# EAGLE board tx-slim-2.4g (EAGLE 9.6.2)
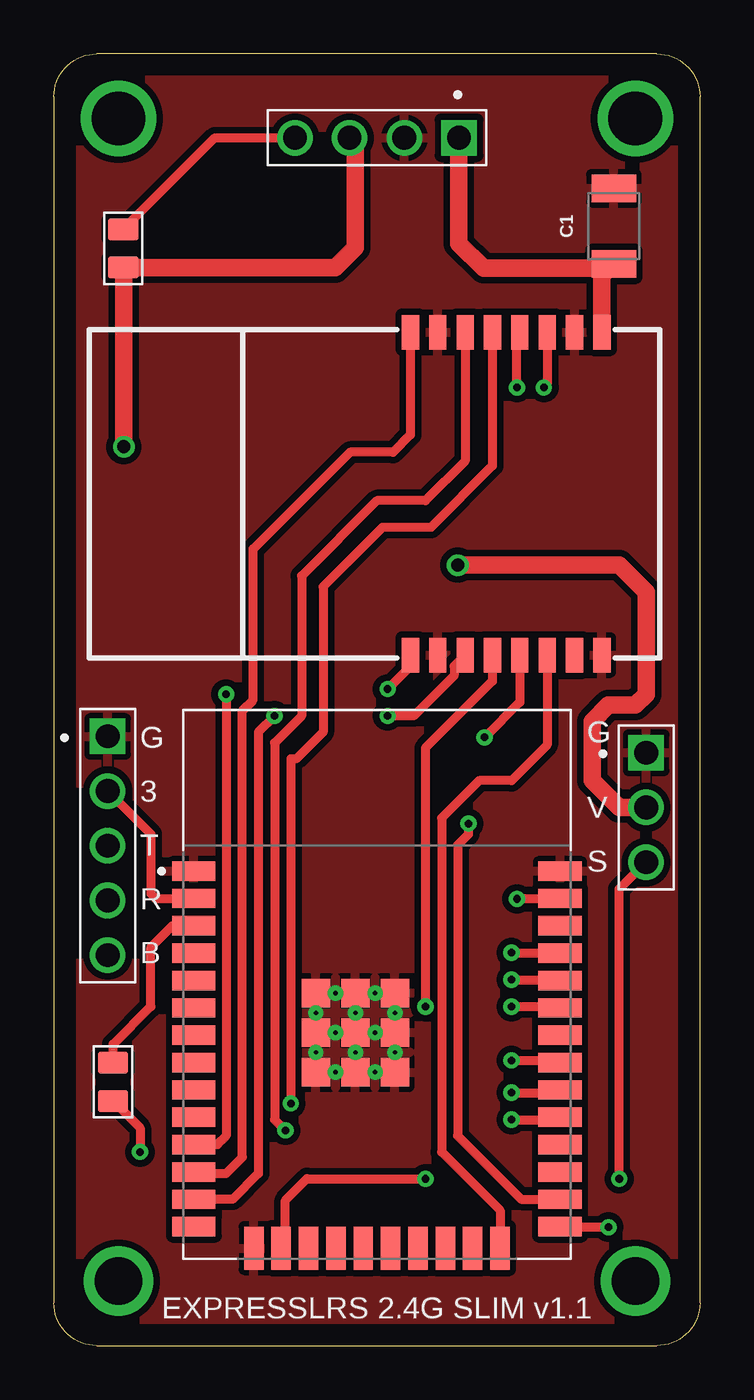
[diagram p0: board, top side]
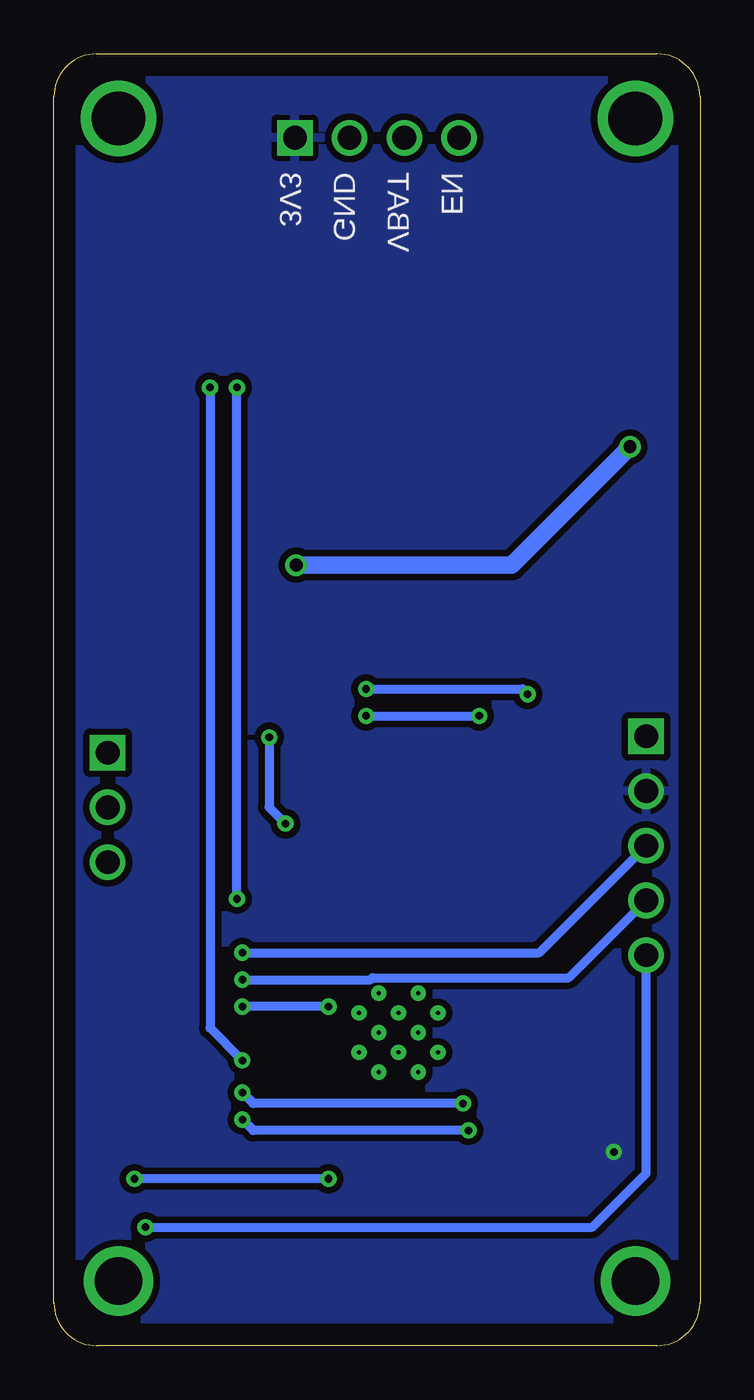
[diagram p1: board, bottom side, seen from below]

Size 30 x 60 mm. Coordinates in mm from the lower left corner, seen from the top.
Outline: 2,0 28,0 arc90 30,2 30,58 arc90 28,60 2,60 arc90 0,58 0,2 arc90 2,0
Copper layers (1*16): Top 0.035mm / dielectric 1.5mm / Bottom 0.035mm
Design rules "default": minimum track width 6mil, minimum drill 0.35mm, track to track 6mil, track to pad 6mil, pad to pad 6mil, via to via 6mil, smd to smd 6mil, copper to edge 40mil, drill to drill 6mil, minimum pad ring 10mil, minimum via ring 8mil, stop-mask expansion 4mil, vias tented up to drill 0mil, thermal gap 10mil

## Footprints (pad centres in the part's own frame; a part is rotated, then mirrored left to right if it is on the bottom)
1210 = smd 1.27 x 2.06: 1 -1.755,0; 2 1.755,0
61300411121 = drill 1.1 square: 1 -3.81,0 | drill 1.1: 2 -1.27,0; 3 1.27,0; 4 3.81,0
61300311121 = drill 1.1 square: 1 -2.54,0 | drill 1.1: 2 0,0; 3 2.54,0
61300511121 = drill 1.1 square: 1 -5.08,0 | drill 1.1: 2 -2.54,0; 3 0,0; 4 2.54,0; 5 5.08,0
MODULE_ESP32-WROOM-32 = smd 2 x 0.9: 1 -8.5,5.26; 2 -8.5,3.99; 3 -8.5,2.72; 4 -8.5,1.45; 5 -8.5,0.18; 6 -8.5,-1.09; 7 -8.5,-2.36; 8 -8.5,-3.63; 9 -8.5,-4.9; 10 -8.5,-6.17; 11 -8.5,-7.44; 12 -8.5,-8.71; 13 -8.5,-9.98; 14 -8.5,-11.25; 25 8.5,-11.25; 26 8.5,-9.98; 27 8.5,-8.71; 28 8.5,-7.44; 29 8.5,-6.17; 30 8.5,-4.9; 31 8.5,-3.63; 32 8.5,-2.36; 33 8.5,-1.09; 34 8.5,0.18; 35 8.5,1.45; 36 8.5,2.72; 37 8.5,3.99; 38 8.5,5.26 | smd 0.9 x 2: 15 -5.715,-12.25; 16 -4.445,-12.25; 17 -3.175,-12.25; 18 -1.905,-12.25; 19 -0.635,-12.25; 20 0.635,-12.25; 21 1.905,-12.25; 22 3.175,-12.25; 23 4.445,-12.25; 24 5.715,-12.25 | smd 1.33 x 1.33: 39_1 -2.835,-0.405; 39_2 -1,-0.405; 39_3 0.835,-0.405; 39_4 -2.835,-2.24; 39_5 -1,-2.24; 39_6 0.835,-2.24; 39_7 -2.835,-4.075; 39_8 -1,-4.075; 39_9 0.835,-4.075 | drill 0.2 pad 0.3: 39_10 -1.917,-0.405; 39_11 -0.083,-0.405; 39_12 -2.835,-1.323; 39_13 -1,-1.323; 39_14 0.835,-1.323; 39_15 -1.917,-2.24; 39_16 -0.083,-2.24; 39_17 -2.835,-3.158; 39_18 -1,-3.158; 39_19 0.835,-3.158; 39_20 -1.917,-4.075; 39_21 -0.083,-4.075
E28 = smd 1.6 x 0.8: P$1 -7.5,-4.445; P$2 -7.5,-3.175; P$3 -7.5,-1.905; P$4 -7.5,-0.635; P$5 -7.5,0.635; P$6 -7.5,1.905; P$7 -7.5,3.175; P$8 -7.5,4.445; P$9 7.5,-4.445; P$10 7.5,-3.175; P$11 7.5,-1.905; P$12 7.5,-0.635; P$13 7.5,0.635; P$14 7.5,1.905; P$15 7.5,3.175; P$16 7.5,4.445
R0805 = smd 1.397 x 1.016: 1 0,0.889; 2 0,-0.889

## Placement (x,y rotation side)
C1  10uF  [1210]  26,52 90 top
J1  61300411121  [61300411121]  15,56.1 180 top
J2  61300311121  [61300311121]  27.5,25 270 top
J3  61300511121  [61300511121]  2.5,23.22 270 top
U1  ESP32-WROOM-32  [MODULE_ESP32-WROOM-32]  15,16.78 0 top
U$1  E28  [E28]  21,39.57 270 top
U$2  10K  [R0805]  3.22,50.96 180 top
U$3  10K  [R0805]  2.75,12.25 0 top

## Library data of the parts
C1 = SparkFun-Capacitors; PROD_ID: CAP-09824
J1 = Headers; CREATED_BY: PCBLayout.com; DIGI_KEY_PART_NUMBER: 732-5317-ND; MANUFACTURER: Wurth Electronics Inc.; MPN: 61300411121
J2 = Headers; CREATED_BY: PCBLayout.com; DIGI_KEY_PART_NUMBER: 732-5316-ND; MANUFACTURER: Wurth Electronics Inc.; MPN: 61300311121
J3 = Headers; CREATED_BY: PCBLayout.com; DIGI_KEY_PART_NUMBER: 732-5318-ND; MANUFACTURER: Wurth Electronics Inc.; MPN: 61300511121
U1 = ESP32-WROOM-32; AVAILABILITY: Warning; DESCRIPTION: Bluetooth, WiFi Transceiver Module 2.4GHz ~ 2.5GHz Surface Mount; DIGIKEY-PURCHASE-URL: https://snapeda.com/shop?store=DigiKey&id=2753322; MF: Espressif Systems; MP: ESP32-WROOM-32; PACKAGE: Module Espressif Systems; PRICE: None
U$1 = e28
U$2 U$3 = OPL_Resistor; MPN: RC0805FR-0710KL

## Nets
3V3: C1.1 J1.1 J3.2 U1.2 U$1.P$8 U$3.2
BOOT0: J3.5 U1.25
BUSY: U1.33 U$1.P$12
DIO1: U1.26 U$1.P$13
DIO2: U1.24 U$1.P$14
GND: C1.2 J1.2 J2.1 J3.1 U1.1 U1.15 U1.38 U1.39_1 U1.39_2 U1.39_3 U1.39_4 U1.39_5 U1.39_6 U1.39_7 U1.39_8 U1.39_9 U1.39_10 U1.39_11 U1.39_12 U1.39_13 U1.39_14 U1.39_15 U1.39_16 U1.39_17 U1.39_18 U1.39_19 U1.39_20 U1.39_21 U$1.P$2 U$1.P$7 U$1.P$10 U$1.P$16
MISO: U1.31 U$1.P$6
MOSI: U1.37 U$1.P$5
N$4: J1.4 U$2.2
N$5: U1.3 U$3.1
N$11: U$1.P$15
NRESET: U1.13 U$1.P$11
NSS: U1.29 U$1.P$3
RX: J3.4 U1.34
RX_EN: U1.12 U$1.P$1
SCK: U1.30 U$1.P$4
SPORT: J2.3 U1.16
TX: J3.3 U1.35
TX_EN: U1.11 U$1.P$9
VBAT: J1.3 J2.2 U$2.1

## Tracks (layer width: path | path; a pad name or v marks a point on that pad's centre or on a via)
3V3  (via drill 0.35)
  Top 0.406: J3.2 4.5,23.76 4.5,21 4.73,20.77 U1.2 | U$3.2 4,10.11 v4,9
  Top 0.813: C1.1 25.8,50.04 | 25.8,50.04 25.45,49.69 U$1.P$8 | J1.1 18.81,51.19 19.96,50.04 25.8,50.04
  pour Bottom (isolate 0.305): 0,0 0,60 30.25,60 30.25,0
BOOT0  (via drill 0.35)
  Top 0.406: U1.25 25.72,5.53 v25.75,5.5
  Bottom 0.406: v25.75,5.5 5,5.5 2.5,8 J3.5
BUSY  (via drill 0.35)
  Top 0.406: U$1.P$12 20.36,30.86 17.25,27.75 v17.25,15.75 | v21.25,15.75 23.44,15.75 U1.33
  Bottom 0.406: v17.25,15.75 v21.25,15.75
DIO1  (via drill 0.35)
  Top 0.406: U$1.P$13 21.64,29.89 v20,28.25 | v19.25,24.25 19.25,23.75 18.75,23.25 18.75,9.75 21.7,6.8 U1.26
  Bottom 0.406: v20,28.25 20,25 v19.25,24.25
DIO2
  Top 0.406: U$1.P$14 22.91,27.91 21.25,26.25 19.75,26.25 18,24.5 18,9 20.71,6.29 U1.24
GND
  pour Top (isolate 0.305): 0,0 0,60 30,60 30,0
MISO  (via drill 0.35)
  Top 0.406: U$1.P$6 22.91,44.66 v22.75,44.5 | v21.25,13.25 23.4,13.25 U1.31
  Bottom 0.406: v22.75,44.5 22.75,14.75 v21.25,13.25
MOSI  (via drill 0.35)
  Top 0.406: U1.37 23.48,20.75 v21.5,20.75 | v21.5,44.5 21.5,46.94 U$1.P$5
  Bottom 0.406: v21.5,20.75 v21.5,44.5
N$1  (via drill 2.5)
  other vias: 3,57
N$2  (via drill 2.2)
  other vias: 27,3
N$3  (via drill 2.5)
  other vias: 27,57
N$4
  Top 0.406: U$2.2 7.47,56.1 J1.4
N$5
  Top 0.406: U$3.1 2.75,14 4.5,15.75 4.5,18.5 5.5,19.5 U1.3
N$456  (via drill 2.2)
  other vias: 3,3
NRESET  (via drill 0.35)
  Top 0.406: U$1.P$11 18.58,31.56 18.58,31.12 16.71,29.25 v15.5,29.25 | v10.25,29.25 9.5,28.5 9.5,8 8.3,6.8 U1.13
  Bottom 0.406: v15.5,29.25 v10.25,29.25
NSS  (via drill 0.35)
  Top 0.406: U$1.P$3 19.09,41.09 17.25,39.25 15,39.25 11.5,35.75 11.5,29.25 10.25,28 10.25,10.5 v10.75,10 | v21.25,10.5 23.39,10.5 U1.29
  Bottom 0.406: v10.75,10 20.75,10 v21.25,10.5
RX  (via drill 0.35)
  Top 0.406: U1.34 21.29,16.96 v21.25,17
  Bottom 0.406: v21.25,17 15.3,17 15.21,17.09 6.09,17.09 J3.4
RX_EN
  Top 0.406: U$1.P$1 16.55,42.3 15.75,41.5 13.75,41.5 9.25,37 9.25,30 8.75,29.5 8.75,8.75 8,8 6.57,8 U1.12
SCK  (via drill 0.35)
  Top 0.406: U$1.P$4 20.36,40.87 17.5,38 15.25,38 12.5,35.25 12.5,28.5 11.25,27.25 11,27.25 v11,11.25 | v21.25,11.75 23.37,11.75 U1.30
  Bottom 0.406: v11,11.25 20.75,11.25 v21.25,11.75
SPORT  (via drill 0.35)
  Top 0.406: U1.16 10.75,4.72 10.75,6.75 11.75,7.75 v17.25,7.75 | J2.3 26.25,21.21 v26.25,7.75
  Bottom 0.406: v17.25,7.75 v26.25,7.75
TX  (via drill 0.35)
  Top 0.406: U1.35 21.27,18.23 v21.25,18.25
  Bottom 0.406: v21.25,18.25 7.47,18.25 J3.3
TX_EN  (via drill 0.35)
  Top 0.406: U1.11 7.59,9.34 8,9.75 v8,30.25 | U$1.P$9 16.55,31.55 v15.5,30.5
  Bottom 0.406: v15.5,30.5 8.25,30.5 v8,30.25
VBAT  (via drill 0.6)
  Top 0.813: J2.2 26.25,25 25,26.25 25,29 25.75,29.75 27,29.75 27.5,30.25 27.5,35 26.25,36.25 v18.75,36.25 | v3.25,41.75 3.25,50.04 U$2.1 13.07,50.07 14,51 14,55.83 J1.3
  Bottom 0.813: v18.75,36.25 8.75,36.25 v3.25,41.75

## Text on the board
tNames: G | G | 3 | V | T | S | R | B | EXPRESSLRS 2.4G SLIM v1.1
bNames: EN | VBAT | GND | 3V3